# EAGLE board SparkFun_XBee_Regulated_Qwiic (EAGLE 9.6.2)
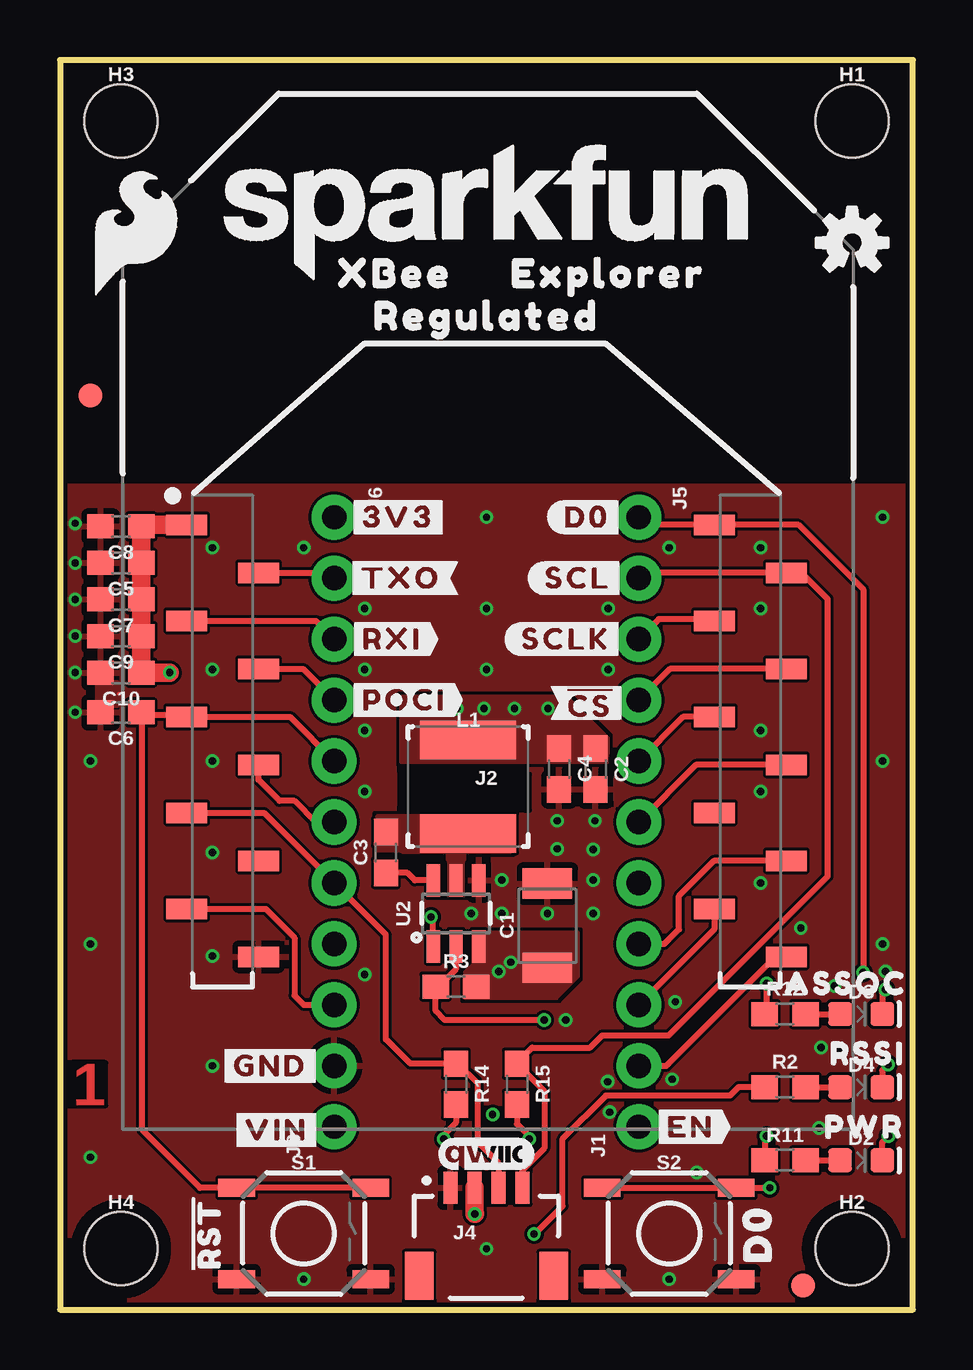
[diagram p0: board, top side]
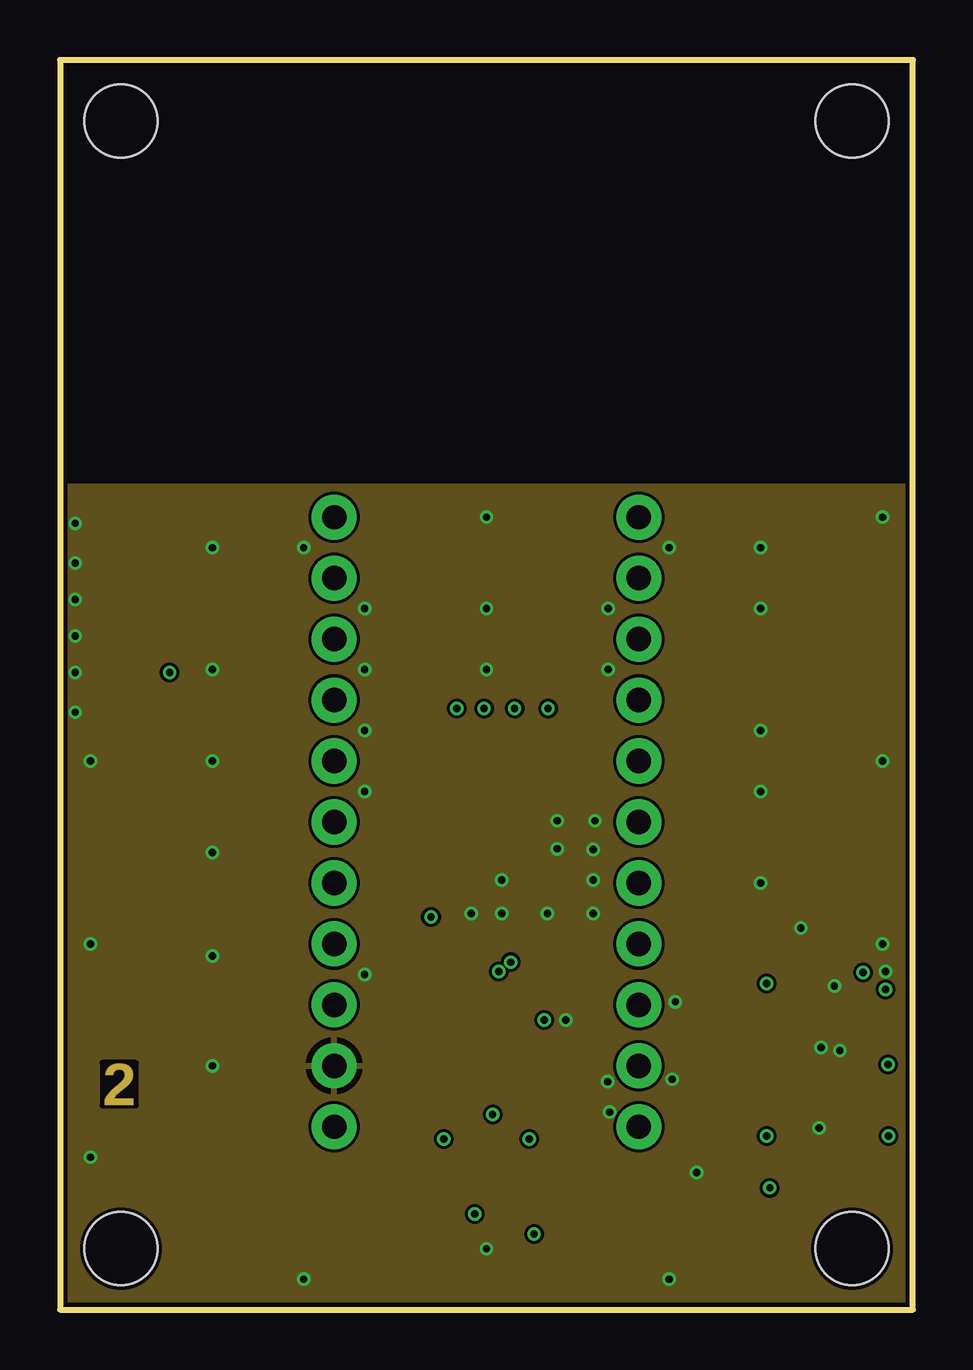
[diagram p1: board, inner layer Route2]
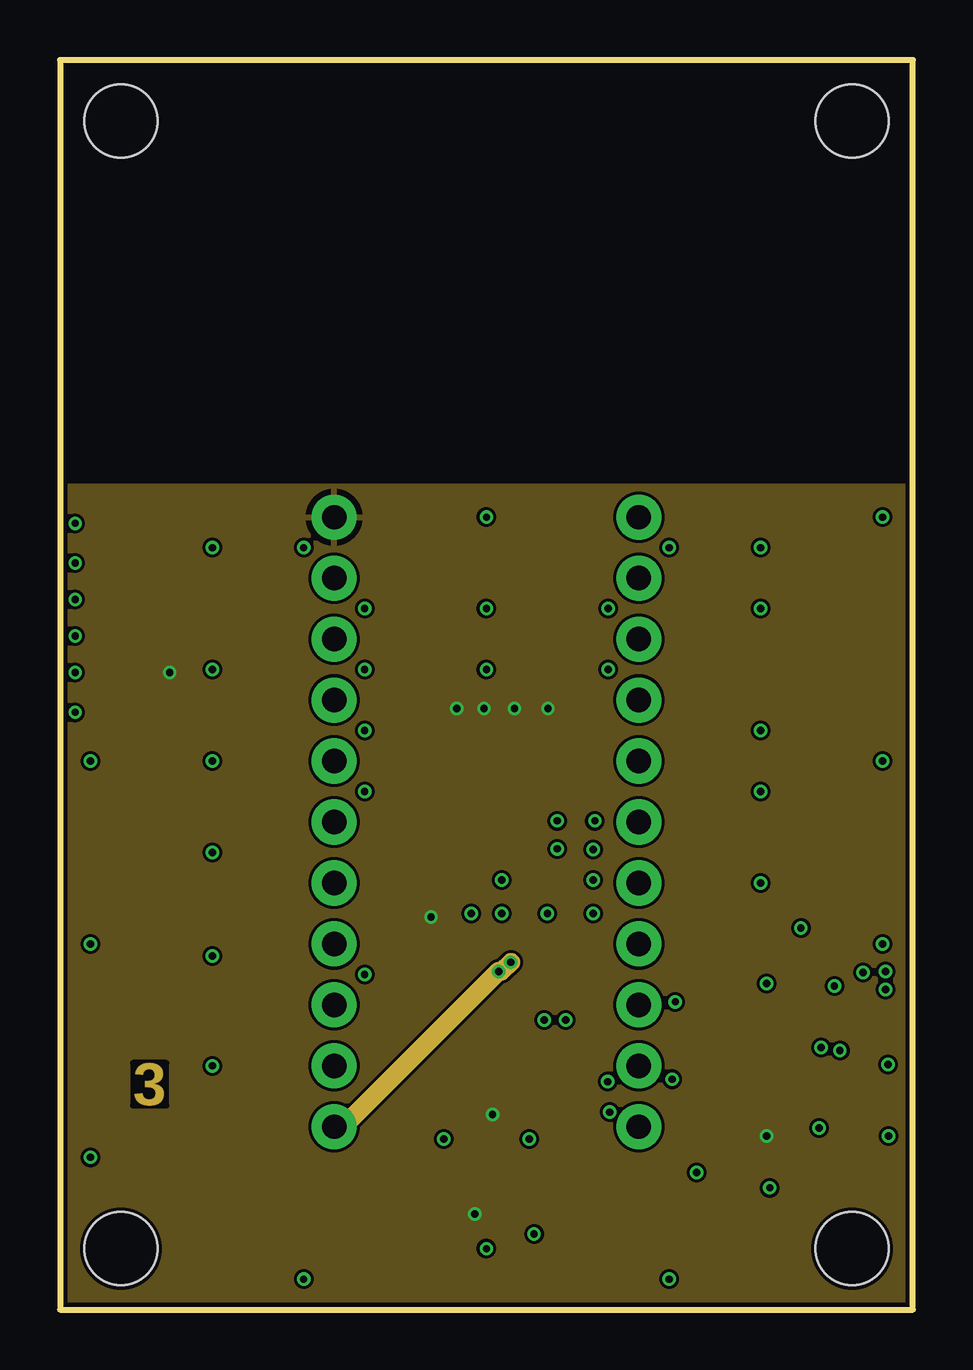
[diagram p2: board, inner layer Route15]
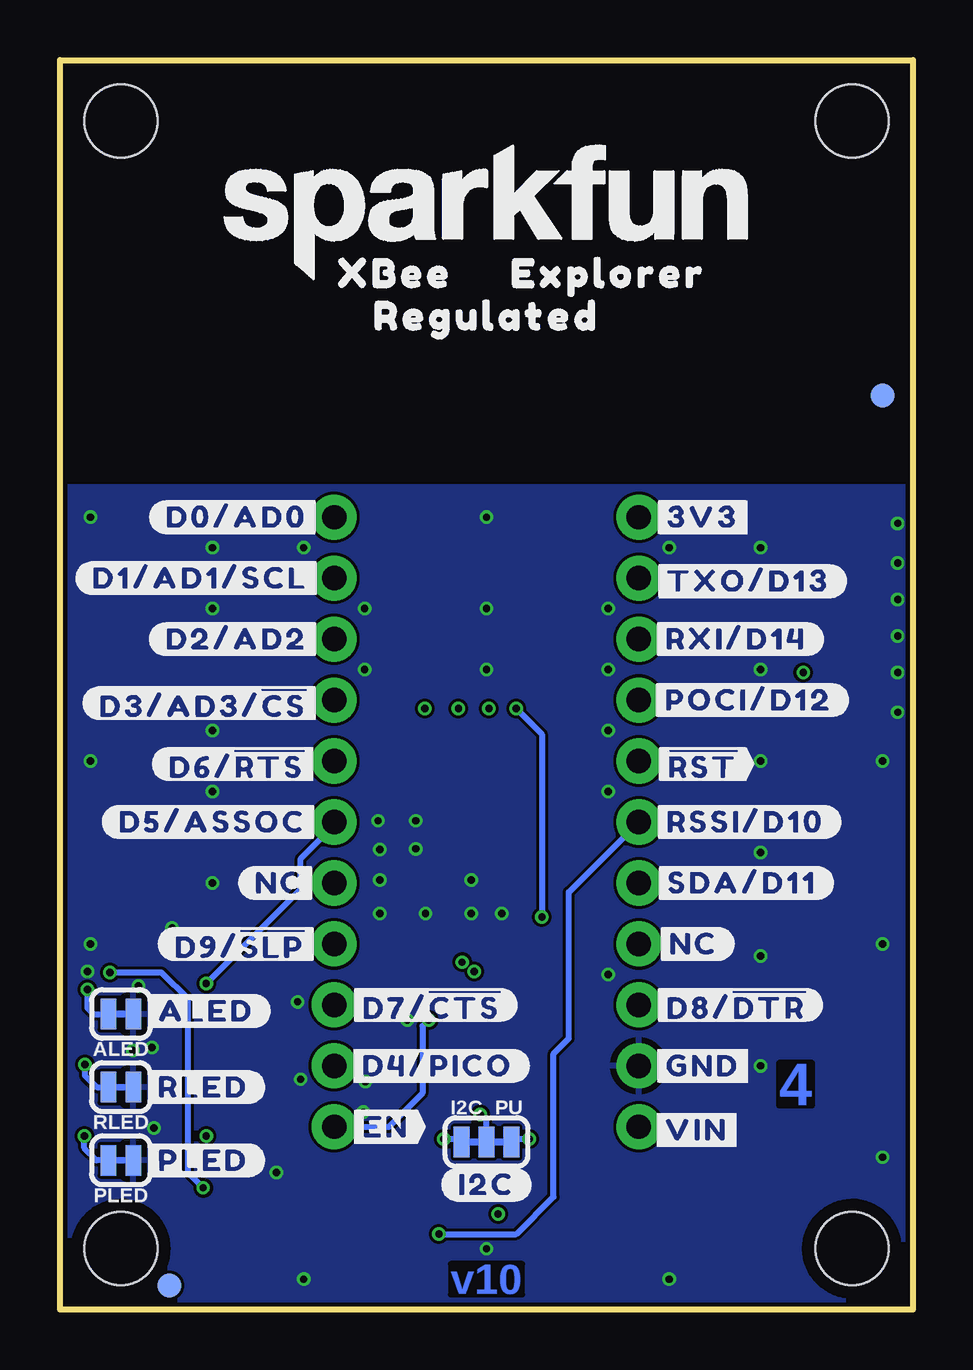
[diagram p3: board, bottom side, seen from below]

Size 35.56 x 52.07 mm. Coordinates in mm from the lower left corner, seen from the top.
Outline: 0,52.07 0,0 35.56,0 35.56,52.07 0,52.07
Copper layers (1*2*15*16): Top 0.035559375mm / dielectric 0.47751875mm / Route2 0.035559375mm / dielectric 0.47751875mm / Route15 0.035559375mm / dielectric 0.47751875mm / Bottom 0.035559375mm
Design rules "SparkFun-4-Layer-Minimum-JLCPCB": minimum track width 5mil, minimum drill 0.2mm, track to track 5mil, track to pad 5mil, pad to pad 5mil, via to via 5mil, smd to smd 5mil, copper to edge 7mil, drill to drill 7mil, minimum pad ring 5mil, minimum via ring 5mil, stop-mask expansion 2.5mil, vias tented up to drill 25mil, thermal gap 10mil
Net classes: 1 POWER: width 0.559 mm, drill 0.305 mm; 2 Diff pairs: width 0.203 mm, drill 0.305 mm, clearance 0.152 mm
tRestrict: area 14.2,21 to 14.4,22.4; area 19.4,20.8 to 19.6,22.3

## Footprints (pad centres in the part's own frame; a part is rotated, then mirrored left to right if it is on the bottom)
SMT-JUMPER_2_NC_TRACE_SILK = smd 0.66 x 1.27: 1 -0.521,0; 2 0.521,0
1210 = smd 1.27 x 2.06: 1 -1.755,0; 2 1.755,0
0603 = smd 1.1 x 1: 1 -0.85,0; 2 0.85,0
LED-0603 = smd 1 x 1: A -0.877,0; C 0.877,0
FIDUCIAL-1X2 = smd 1 x 1: 1 0,0
STAND-OFF-TIGHT = hole 3.048: 0,0
SMT-JUMPER_3_2-NC_TRACE_SILK = smd 0.66 x 1.27: 1 -1.041,0; 2 0,0; 3 1.041,0
1X01_NO_SILK_STAND = drill 1.016 pad 1.88: 1 0,0
XBEE3-SMD = smd 1.7 x 0.85: 1 -12.5,11.11; 2 -9.5,9.11; 3 -12.5,7.11; 4 -9.5,5.11; 5 -12.5,3.11; 6 -9.5,1.11; 7 -12.5,-0.89; 8 -9.5,-2.89; 9 -12.5,-4.89; 10 -9.5,-6.89; 11 12.5,-6.89; 12 9.5,-4.89; 13 12.5,-2.89; 14 9.5,-0.89; 15 12.5,1.11; 16 9.5,3.11; 17 12.5,5.11; 18 9.5,7.11; 19 12.5,9.11; 20 9.5,11.11
JST04_1MM_RA = smd 0.6 x 1.35: 1 -1.5,0; 2 -0.5,0; 3 0.5,0; 4 1.5,0 | smd 1.2 x 2: NC1 2.8,-3.675; NC2 -2.8,-3.675
1X10_NO_SILK = drill 1.016 pad 1.88: 1 0,0; 2 2.54,0; 3 5.08,0; 4 7.62,0; 5 10.16,0; 6 12.7,0; 7 15.24,0; 8 17.78,0; 9 20.32,0; 10 22.86,0
INDUCTOR_3.9UH = smd 4 x 1.6: P$1 0,-2; P$2 0,1.9
TACTILE_SWITCH_SMD_5.2MM = smd 1.524 x 0.762: 1 -2.794,1.905; 2 2.794,1.905; 3 -2.794,-1.905; 4 2.794,-1.905
SOT23-6 = smd 0.55 x 1.35: 1 -0.95,-1.375; 2 0,-1.375; 3 0.95,-1.375; 4 0.95,1.375; 5 0,1.375; 6 -0.95,1.375

## Placement (x,y rotation side)
ALED  JUMPER-SMT_2_NC_TRACE_SILK  [SMT-JUMPER_2_NC_TRACE_SILK]  33.02,12.32 180 bottom
C1  10uF  [1210]  20.32,16 90 top
C2  22uF  [0603]  22.33,22.53 270 top
C3  0.1uF  [0603]  13.59,19.05 90 top
C4  22uF  [0603]  20.8,22.53 270 top
C5  47pF  [0603]  2.54,31.11 180 top
C6  10nF  [0603]  2.54,24.89 180 top
C7  10nF  [0603]  2.54,29.59 180 top
C8  10pF  [0603]  2.54,32.64 180 top
C9  0.1uF  [0603]  2.54,28.07 180 top
C10  10uF  [0603]  2.54,26.54 180 top
D2  RED  [LED-0603]  33.4,6.22 0 top
D3  BLUE  [LED-0603]  33.4,12.32 0 top
D4  Yellow  [LED-0603]  33.4,9.27 0 top
FD1  FIDUCIAL1X2  [FIDUCIAL-1X2]  1.27,38.1 0 top
FD2  FIDUCIAL1X2  [FIDUCIAL-1X2]  1.27,38.1 0 bottom
FD3  FIDUCIAL1X2  [FIDUCIAL-1X2]  30.99,1.02 0 top
FD4  FIDUCIAL1X2  [FIDUCIAL-1X2]  30.99,1.02 0 bottom
FRAME2  FRAME-LETTER  [CREATIVE_COMMONS]  -8.89,-27.94 0 top  (outside the outline)
H1  STAND-OFFTIGHT  [STAND-OFF-TIGHT]  33.02,49.53 0 top
H2  STAND-OFFTIGHT  [STAND-OFF-TIGHT]  33.02,2.54 0 top
H3  STAND-OFFTIGHT  [STAND-OFF-TIGHT]  2.54,49.53 0 top
H4  STAND-OFFTIGHT  [STAND-OFF-TIGHT]  2.54,2.54 0 top
I2C_PU  JUMPER-SMT_3_2-NC_TRACE_SILK  [SMT-JUMPER_3_2-NC_TRACE_SILK]  17.78,6.99 0 bottom
J1  [1X01_NO_SILK_STAND]  24.13,7.62 90 top
J2  [XBEE3-SMD]  17.78,21.59 0 top
J3  [1X01_NO_SILK_STAND]  11.43,7.62 90 top
J4  QWIIC_RIGHT_ANGLE  [JST04_1MM_RA]  17.78,5.08 0 top
J5  [1X10_NO_SILK]  24.13,33.02 270 top
J6  [1X10_NO_SILK]  11.43,33.02 270 top
L1  3.9UH  [INDUCTOR_3.9UH]  17.02,21.84 0 top
LOGO1  SPECIAL_INSTRUCTIONS-ORDERING  [ORDERING_INSTRUCTIONS]  46.99,52.07 0 top  (outside the outline)
LOGO2  OSHW-LOGOS  [OSHW-LOGO-S]  33.02,44.45 0 top
LOGO3  QWIIC_LOGO_4MM  [QWIIC_4MM]  17.78,6.48 0 top
LOGO4  SFE_LOGO_NAMEBLANK  [BLANK]  -8.89,-27.94 0 top  (outside the outline)
PLED  JUMPER-SMT_2_NC_TRACE_SILK  [SMT-JUMPER_2_NC_TRACE_SILK]  33.02,6.22 180 bottom
R2  2.2k  [0603]  30.23,9.27 0 top
R3  10k  [0603]  16.51,13.46 0 top
R11  4.7k  [0603]  30.23,6.22 0 top
R12  2.2k  [0603]  30.23,12.32 0 top
R14  2.2k  [0603]  16.51,9.4 270 top
R15  2.2k  [0603]  19.05,9.4 270 top
RLED  JUMPER-SMT_2_NC_TRACE_SILK  [SMT-JUMPER_2_NC_TRACE_SILK]  33.02,9.27 180 bottom
S1  [TACTILE_SWITCH_SMD_5.2MM]  10.16,3.17 0 top
S2  [TACTILE_SWITCH_SMD_5.2MM]  25.4,3.17 0 top
U2  AP63203  [SOT23-6]  16.51,16.51 0 top
U$1  [#GND#0]  8.76,10.16 0 top
U$2  [SFE_LOGO_NAME_.2]  17.78,45.72 0 top
U$3  [#EN#17]  21.97,7.62 0 bottom
U$4  [#NC#1]  9.14,15.24 0 bottom
U$5  [#NC#3]  26.42,17.78 0 bottom
U$6  [#EN#17]  26.29,7.62 0 top
U$7  [#D7##CTS##26]  20.07,12.7 0 bottom
U$8  [#D0#AD0#18]  28.19,33.02 0 bottom
U$9  [#3V3#1]  14.1,33.02 0 top
U$10  [#D4#PICO#25]  19.81,10.16 0 bottom
U$11  [#RLED#22]  29.59,9.27 0 bottom
U$12  [#GND#0]  8.76,10.16 0 bottom
U$13  [#D8##DTR##27]  7.37,12.7 0 bottom
U$14  [#RSSI#D10#17]  6.98,20.32 0 bottom
U$15  [#SDA#D11#9]  7.11,17.78 0 bottom
U$16  [##RST##15]  8.76,22.73 0 bottom
U$17  [#POCI#D12#24]  6.86,25.4 0 bottom
U$18  [#RXI#D14#15]  7.37,27.94 0 bottom
U$19  [#D2#AD2#19]  28.19,27.94 0 bottom
U$20  [#D6##RTS##25]  28.19,22.73 0 bottom
U$21  [#TXO#8]  14.22,30.48 0 top
U$22  [#TXO#D13#13]  6.86,30.35 0 bottom
U$23  [EXPLORER1344]  12.7,43.18 0 bottom
U$24  [REGULATED1343]  17.78,41.4 0 bottom
U$25  [XBEE340]  21.59,43.18 0 bottom
U$26  [#I2C#33]  17.78,5.21 0 bottom
U$27  [#RXI#7]  13.84,27.94 0 top
U$28  [XBEE340]  13.97,43.18 0 top
U$29  [REGULATED1343]  17.78,41.4 0 top
U$30  [#RST#30]  6.1,3.17 90 top
U$31  [#D0#3]  21.97,33.02 0 top
U$32  [#D1#AD1#SCL#8]  29.72,30.48 0 bottom
U$33  [EXPLORER1344]  22.86,43.18 0 top
U$34  [#D3#AD3##CS##23]  29.59,25.27 0 bottom
U$35  [#D5#ASSOC#25]  29.21,20.32 0 bottom
U$36  [#D9##SLP##28]  28.07,15.24 0 bottom
U$40  [D03]  29.08,3.17 90 top
U$42  [PWR26]  33.53,7.62 0 top
U$43  [ASSOC27]  32.77,13.59 0 top
U$44  [#3V3#1]  8.76,33.02 0 bottom
U$45  [#POCI#32]  14.35,25.4 0 top
U$46  [#VIN#4]  9.02,7.49 0 bottom
U$49  [#ALED#21]  29.46,12.45 0 bottom
U$52  [#PLED#20]  29.59,6.22 0 bottom
U$59  [##CS##26]  22.1,25.27 0 top
U$60  [#SCLK#33]  21.08,27.94 0 top
U$61  [SFE_LOGO_FLAME_.2]  3.17,44.83 0 top
U$62  [RSSI31]  33.66,10.67 0 top
U$63  [SFE_LOGO_NAME_.2]  17.78,45.72 0 bottom
U$64  [#SCL#9]  21.59,30.48 0 top
U$65  [#D0#3]  21.97,33.02 0 top
U$66  [#VIN#4]  9.02,7.49 0 top

## Library data of the parts
ALED I2C_PU PLED RLED = SparkFun-Jumpers
C1 = SparkFun-Capacitors; PROD_ID: CAP-09824
C2 C4 = SparkFun-Capacitors; PROD_ID: CAP-14464
C3 = SparkFun-Capacitors; PROD_ID: CAP-08604
C5 = SparkFun-Capacitors; PROD_ID: CAP-08913
C6 C7 = SparkFun-Capacitors; PROD_ID: CAP-00867
C8 = SparkFun-Capacitors; PROD_ID: CAP-11812
C9 = SparkFun-Capacitors; PROD_ID: CAP-00810
C10 = SparkFun-Capacitors; PROD_ID: CAP-11015
D2 = SparkFun-LED; PROD_ID: DIO-17976
D3 = SparkFun-LED; PROD_ID: DIO-08575
D4 = SparkFun-LED; PROD_ID: DIO-09003
FD1-FD4 FRAME2 LOGO1-LOGO4 U$2 U$61 U$63 = SparkFun-Aesthetics
H1-H4 = SparkFun-Hardware
J1 J3 J5 J6 = SparkFun-Connectors
J2 = xbee_smart_modem
J4 = SparkFun-Connectors; PROD_ID: CONN-13694
L1 = SparkFun-Coils; PROD_ID: NDUC-18014
R2 R12 R14 R15 = SparkFun-Resistors; PROD_ID: RES-08272
R3 = SparkFun-Resistors; PROD_ID: RES-00824
R11 = SparkFun-Resistors; PROD_ID: RES-07857
S1 S2 = SparkFun-Switches; PROD_ID: SWCH-14139
U2 = SparkFun-IC-Power; PROD_ID: VREG-15244
U$1 U$3 U$4 U$6 U$8 U$11-U$20 U$22-U$24 U$29 U$32-U$36 U$49 U$52 = topmirror
U$5 U$21 U$27 U$31 U$45 U$59 U$60 U$64 U$65 = botmirror
U$7 U$9 U$10 U$25 U$26 U$28 U$30 U$42-U$44 U$46 U$62 U$66 = top
U$40 = bot

## Nets
3.3V: C2.1 C4.1 C5.1 C7.1 C8.1 C9.1 C10.1 I2C_PU.2 J2.1 J4.2 J6.1 L1.P$2 R11.1 U2.1
!RESET!: C6.1 J2.5 J6.5 S1.1 S1.2
D0: J2.20 J5.1 S2.1 S2.2
D1/SCL: J2.19 J4.4 J5.2 R15.1
D2/SPI_CLK: J2.18 J5.3
D3/SPI_!CS!: J2.17 J5.4
D4/SPI_PICO: J2.11 J5.10
D5/ASSOCIATE: J2.15 J5.6 R12.1
D6/!RTS!: J2.16 J5.5
D7/!CTS!: J2.12 J5.9
D8/!DTR!: J2.9 J6.9
D9/!SLEEP!: J2.13 J5.8
D10/RSSI_PWM: J2.6 J6.6 R2.1
D11/SDA: J2.7 J4.3 J6.7 R14.1
D12/SPI_POCI: J2.4 J6.4
D13/TXO: J2.2 J6.2
D14/RXI: J2.3 J6.3
EN: J1.1 R3.1 U2.2
GND: ALED.1 C1.2 C2.2 C4.2 C5.2 C6.2 C7.2 C8.2 C9.2 C10.2 J2.10 J4.1 J6.10 PLED.1 RLED.1 S1.3 S1.4 S2.3 S2.4 U2.4
N$1: C3.1 U2.6
N$2: D4.A R2.2
N$3: D4.C RLED.2
N$7: D2.A R11.2
N$8: C3.2 L1.P$1 U2.5
N$11: I2C_PU.3 R14.2
N$12: D3.A R12.2
N$13: I2C_PU.1 R15.2
N$21: ALED.2 D3.C
N$23: D2.C PLED.2
VIN: C1.1 J3.1 R3.2 U2.3

## Tracks (layer width: path | path; a pad name or v marks a point on that pad's centre or on a via)
3.3V  (via drill 0.3)
  Top 0.254: v29.46,7.24 29.38,7.15 R11.1 | v15.47,16.36 15.56,16.27 U2.1
  Top 0.762: J4.2 17.28,4 v17.3,3.99 | J2.1 3.45,32.7 C8.1 C5.1 C7.1 C9.1 C10.1 v4.57,26.54
  Bottom 0.254: v16.54,25.04 15.47,23.98 v15.47,16.36 | I2C_PU.2 17.78,7.87 v18.03,8.13
  other vias: 17.68,25.04 18.95,25.04 20.35,25.04
  pour Top (isolate 0.305, no thermals): 22.83,22.78 14.22,22.78 14.22,25.58 21.11,25.58 22.83,23.85
  pour Route15 (isolate 0.127, rank 3): 0,0 35.56,0 35.56,34.29 0,34.29
!RESET!
  Top 0.254: J6.5 9.59,24.7 J2.5 5.21,24.77 3.52,24.77 C6.1 3.43,24.85 3.43,7.49 5.84,5.08 S1.1 S1.2
D0  (via drill 0.3)
  Top 0.254: J5.1 24.45,32.7 J2.20 30.8,32.7 33.48,30.02 v33.48,14.05 | S2.1 S2.2 v29.59,5.08
  Bottom 0.254: v29.59,5.08 30.23,5.71 30.23,12.95 31.32,14.05 v33.48,14.05
D1/SCL
  Top 0.254: J5.2 24.35,30.7 J2.19 30.91,30.7 32,29.61 32,18.06 25.38,11.43 22.61,11.43 22.1,10.92 19.68,10.92 19.05,10.29 R15.1 20.19,9.11 20.19,6.73 19.28,5.82 J4.4
D2/SPI_CLK
  Top 0.254: J2.18 27.2,28.78 24.97,28.78 J5.3
D3/SPI_!CS!
  Top 0.254: J5.4 25.43,26.7 J2.17
D4/SPI_PICO
  Top 0.254: J5.10 25.27,10.16 29.81,14.7 J2.11
D5/ASSOCIATE  (via drill 0.3)
  Top 0.254: J2.15 26.51,22.7 J5.6 | R12.1 29.46,12.41 v29.46,13.59
  Bottom 0.254: J5.6 24.07,20.26 25.53,18.8 25.53,17.53 v29.46,13.59
D6/!RTS!
  Top 0.254: J5.5 25.97,24.7 J2.16
D7/!CTS!
  Top 0.254: J2.12 27.28,15.85 J5.9
D8/!DTR!
  Top 0.254: J2.9 8.57,16.7 9.78,15.49 9.78,13.08 10.16,12.7 J6.9
D9/!SLEEP!
  Top 0.254: J2.13 27.26,18.7 25.81,17.25 25.81,15.85 25.2,15.24 J5.8
D10/RSSI_PWM  (via drill 0.3)
  Top 0.254: J6.6 10.66,20.32 9.78,21.2 9.15,21.2 8.28,22.07 J2.6 | R2.1 28.28,9.27 27.93,8.91 22.76,8.91 20.95,7.11 20.95,4.32 19.79,3.15 v19.76,3.15
  Bottom 0.254: v19.76,3.15 16.54,3.15 14.99,4.7 14.99,10.67 14.35,11.3 14.35,17.4 J6.6
D11/SDA
  Top 0.254: J2.7 8.51,20.7 J6.7 13.59,15.62 13.59,11.26 14.61,10.25 R14.1 16.6,10.25 17.4,9.45 17.4,6.99 18.28,6.11 J4.3
D12/SPI_POCI
  Top 0.254: J2.4 10.13,26.7 J6.4
D13/TXO
  Top 0.254: J2.2 11.21,30.7 J6.2
D14/RXI
  Top 0.254: J6.3 10.67,28.7 J2.3
EN  (via drill 0.3)
  Top 0.254: U2.2 16.51,14.19 15.79,13.46 R3.1 15.66,12.45 16.04,12.06 v20.19,12.06
  Bottom 0.254: J1.1 21.84,7.62 20.45,9.02 20.45,11.81 v20.19,12.06
GND  (via drill 0.3)
  Top 0.152: 2.54,25.65 2.45,25.65
  other vias: 20.73,19.2 22.22,19.18 18.41,16.51 6.35,14.73 25.65,12.83 1.27,6.35 10.16,1.27 17.78,2.54 25.4,1.27 0.64,26.54 0.64,28.07 0.64,32.77 0.64,29.59 0.64,31.11 20.32,16.51 22.22,17.91 22.22,16.51 26.54,5.71 22.91,8.23 18.41,17.91 0.64,24.89 34.29,33.02 34.29,22.86 30.89,15.9 34.29,15.24 1.27,15.24 1.27,22.86 21.08,12.06 31.72,10.92 34.42,14.1 32.51,10.79 32.28,13.49 17.78,33.02 31.65,7.57 22.83,9.5 6.35,31.75 6.35,26.67 6.35,19.05 6.35,22.86 29.21,31.75 29.21,29.21 29.21,24.13 29.21,21.59 29.21,17.78 25.4,31.75 10.16,31.75 17.78,29.21 17.78,26.67 22.86,29.21 22.86,26.67 12.7,29.21 12.7,26.67 12.7,21.59 12.7,13.97 6.35,10.16 25.53,9.6 22.3,20.37 20.73,20.37 12.7,24.13 17.14,16.51
  pour Top (isolate 0.127, rank 3): 0,0 35.56,0 35.56,34.29 0,34.29
  pour Bottom (isolate 0.127, rank 3): 0,0 35.56,0 35.56,34.29 0,34.29
  pour Route2 (isolate 0.127, rank 3): 0,0 35.56,0 35.56,34.29 0,34.29
  pour Top (isolate 0.305, no thermals): 1.52,26.16 2.41,26.16 2.92,25.65 2.41,25.15 1.52,25.15
N$1
  Top 0.254: U2.6 14.8,17.89 14.48,18.2 C3.1
N$2
  Top 0.254: R2.2 D4.A
N$3  (via drill 0.3)
  Top 0.254: v34.52,10.21 34.28,9.97 D4.C
  Bottom 0.254: v34.52,10.21 34.52,9.75 34.04,9.27 RLED.2
N$7
  Top 0.254: R11.2 D2.A
N$8
  pour Top (isolate 0.305, no thermals): 16.89,17.27 16.89,19.05 18.8,19.05 18.8,20.57 13.21,20.57 13.21,19.05 16.13,19.05 16.13,17.27
N$11  (via drill 0.3)
  Top 0.254: R14.2 16.51,7.79 16,7.28 v16,7.11
  Bottom 0.254: I2C_PU.3 16.61,7.11 v16,7.11
N$12
  Top 0.254: R12.2 D3.A
N$13  (via drill 0.3)
  Top 0.254: R15.2 19.05,7.75 19.56,7.24 v19.56,7.11
  Bottom 0.254: v19.56,7.11 18.95,7.11 I2C_PU.1
N$21  (via drill 0.3)
  Top 0.254: v34.42,13.34 34.28,13.2 D3.C
  Bottom 0.254: v34.42,13.34 34.42,12.57 34.16,12.32 ALED.2
N$23  (via drill 0.3)
  Top 0.254: D2.C 34.28,6.97 v34.54,7.24
  Bottom 0.254: PLED.2 34.04,6.22 34.54,6.73 v34.54,7.24
VIN  (via drill 0.3)
  Route15 0.762: J3.1 11.81,7.62 v18.29,14.1 18.41,14.1 v18.8,14.48
  pour Top (no thermals): 16.89,12.95 16.89,14.1 17.27,14.48 17.27,15.75 21.59,15.75 21.59,13.84 20.7,12.95

## Text on the board
Top: 1
Route2: 2
Route15: 3
Bottom: 4 | v10
Measures: Units in Inches
tDocu: Four Layer Board | 1.6mm Thickness | Lead Free HASL | Elias Santistevan